# Altium PCB PCB_transistor-as-switch_2025-12-18.pcbdoc
Units mil, origin at the board's own origin, x right, y up, seen from the top; angles counter-clockwise.
Board outline 2154.4 x 1754.8 mil, 2 copper layers (Top Layer, Bottom Layer); 7 components, 5 nets, 13 pads, 0 vias.
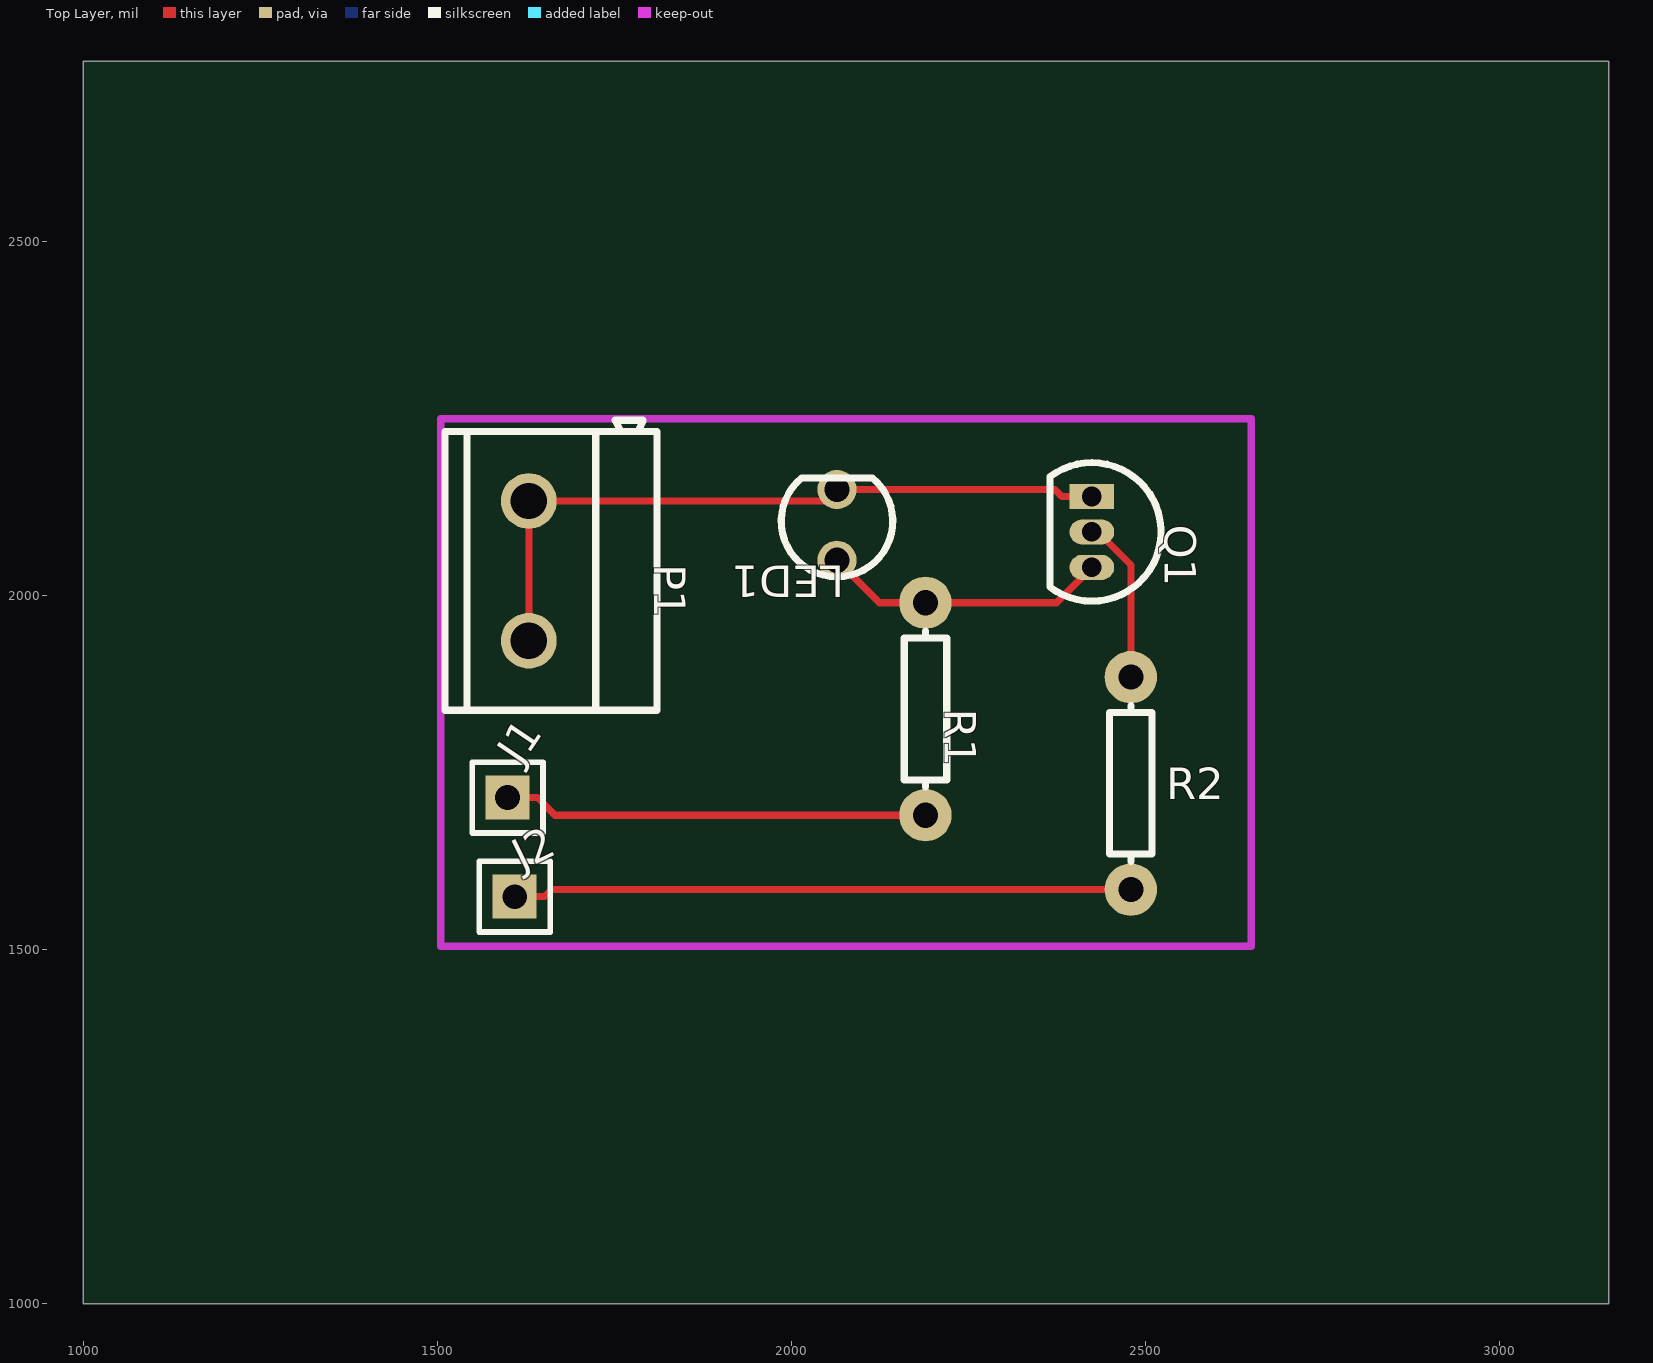
[diagram p0: Top Layer view]
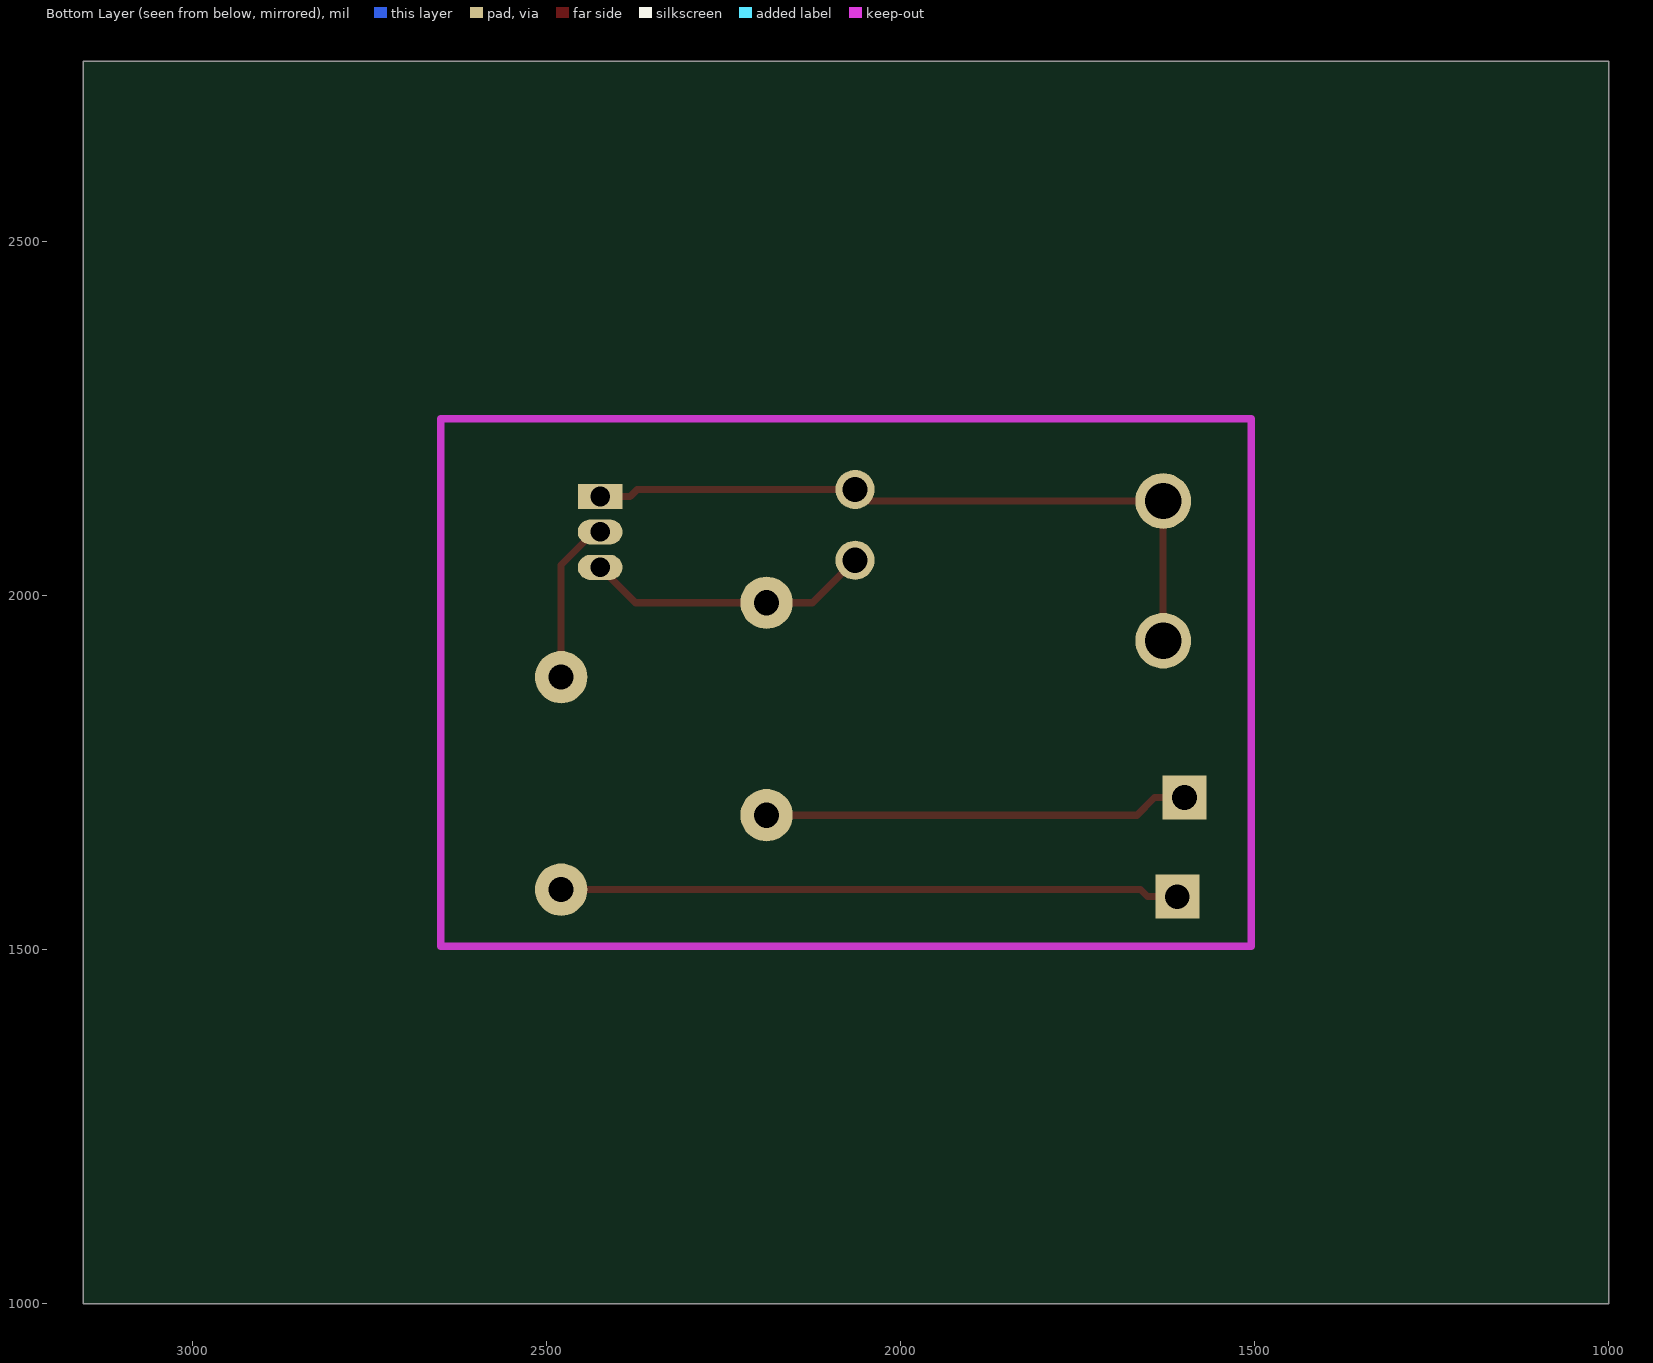
[diagram p1: Bottom Layer view, seen from below]

## Layer stack, top to bottom
Top Layer: signal copper (thickness not stored)
Dielectric: dielectric 12.6, FR-4, Dk 4.8
Bottom Layer: signal copper (thickness not stored)

## Board outline
3154.4,1000 1000,1000 1000,2754.8 3154.4,2754.8

## Components (designator, comment, footprint, x,y, rotation, side; value= is the part's Value field where it differs from the comment)
J1 "vcc" HDR-M-2.54_1X1 1599.4,1715 r0 top
J2 "input" HDR-M-2.54_1X1 1609.4,1575 r0 top
LED1 "LED-TH-3mm_R" LED-TH_BD3.0_RED 2064.4,2100 r180 top
P1 "ground" CONN-TH_2P-P5.00 1629.4,2035 r270 top
Q1 "2N2222" TO-92-3_L4.9-W3.7-P1.27-L 2424.4,2090 r270 top
R1 "100" R_AXIAL-0.3 2189.4,1840 r270 top
R2 "1k" R_AXIAL-0.3 2479.4,1735 r270 top

## Footprints (in the part's own frame and the unit in brackets; to place one, negate y for a bottom-side part, rotate by r counter-clockwise, add the part's x,y. Pads: shape width x height; smd on the part's side, far side on the other; paste and mask are expansions set on the pad)
CONN-TH_2P-P5.00 [mm]
  round 2 hole 1.3 paste+0 mask+0.051: 1(-2.504,0) 2(2.504,0)
  silkscreen extent -5.4,-3 5,4.6
HDR-M-2.54_1X1 [mil]
  rect 62x62 hole 35 paste+0 mask+2: 1(0,0)
  silkscreen extent -50,-50 50,50
LED-TH_BD3.0_RED [mm]
  round 1.4 hole 0.9 paste+0 mask+0.051: 1(0,1.27) 2(0,-1.27)
  silkscreen extent -2,-1.69 2,1.87
R_AXIAL-0.3 [mil]
  round 74 hole 35.4 paste+0 mask+2: 1(-150,0) 2(150,0)
  silkscreen extent -110,-30 110,30
TO-92-3_L4.9-W3.7-P1.27-L [mm]
  rect 0.9x1.6 hole 0.7 paste+0 mask+0.051: 1(-1.27,0)
  oval 0.9x1.6 hole 0.7 paste+0 mask+0.051: 2(0,0) 3(1.27,0)
  silkscreen extent -2.48,-1.5 2.48,2.48

## Nets (pads, with @x,y where several pads share a name; then routed paths per layer and width w, separated by ;. In a path a pad name is that pad's centre, name@x,y a point inside that pad or via, vN(x,y) a via of type N, cw(c..) or ccw(c..) an arc to the next point about the centre after c; other vN are vias at no path point)
Q1_1: LED1.2 P1.1 P1.2 Q1.1 | length 1003.1
  Top Layer w10: P1.2 P1.1 2048,2133.6 LED1.2 2371.89,2150 2381.89,2140 Q1.1
Q1_2: Q1.2 R2.1 | length 232.7
  Top Layer w10: Q1.2 2432.86,2090 2479.4,2043.46 R2.1
Q1_3: LED1.1 Q1.3 R1.1 | length 405.6
  Top Layer w10: LED1.1 2124.4,1990 R1.1 2374.4,1990 Q1.3
R1_2: J1.1 R1.2 | length 600.4
  Top Layer w10: J1.1 1641.41,1715 1666.41,1690 R1.2
R2_2: J2.1 R2.2 | length 874.1
  Top Layer w10: J2.1 1651.41,1575 1661.41,1585 R2.2